# EAGLE board usbc-plug-test (EAGLE 9.4.2)
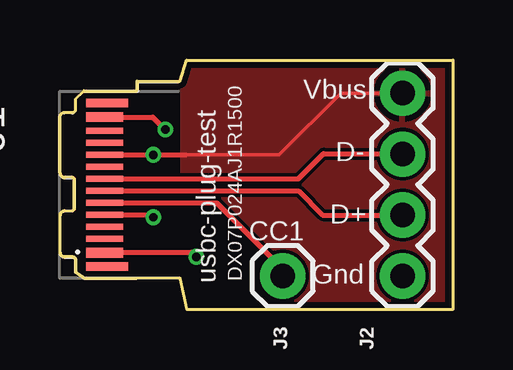
[diagram p0: board, top side]
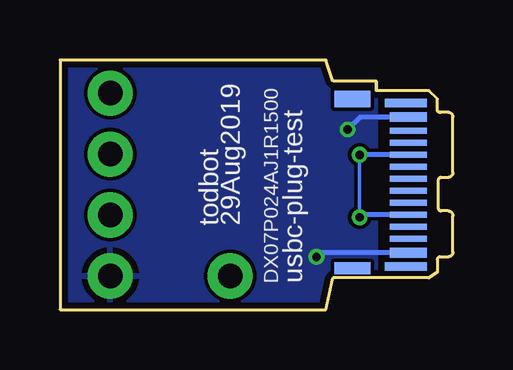
[diagram p1: board, bottom side, seen from below]

Size 16.39 x 10.4 mm. Coordinates in mm from the lower left corner, seen from the top.
Outline: 3.2,9.52 5,9.52 5.29,10.4 16.39,10.4 16.39,0 5.3,0 5,1.32 1,1.32 0.65,1.56 0.65,2.07 arc90 0.55,2.2 0.2,2.2 arc-90 0,2.4 0,3.91 arc-90 0.2,4.11 0.5,4.11 arc90 0.6,4.21 0.6,5.41 arc90 0.5,5.51 0.2,5.51 arc-90 0,5.71 0,8.02 arc-90 0.2,8.22 0.5,8.22 arc90 0.65,8.3 0.65,8.78 1,9.12 3.2,9.12 3.2,9.52
Copper layers (1*16): Top 0.035mm / dielectric 0.785mm / Bottom 0.035mm
Design rules "SeeedStudio_2layer_DRU_no_angle_20140221_blink1thin": minimum track width 6mil, minimum drill 12mil, track to track 6mil, track to pad 6mil, pad to pad 6mil, via to via 6mil, smd to smd 0mil, copper to edge 10mil, drill to drill 10mil, minimum pad ring 10mil, minimum via ring 6mil, stop-mask expansion 2mil, vias tented up to drill 100mil, thermal gap 10mil

## Footprints (pad centres in the part's own frame; a part is rotated, then mirrored left to right if it is on the bottom)
JAE_DX07P024AJ1R1500 = smd 0.36 x 1.75: 13 -3.405,1.975; 14 3.405,1.975 | smd 0.36 x 1.75 bottom: 15 -3.405,1.975; 16 3.405,1.975 | smd 0.7 x 1.5 bottom: 17 -3.575,4.2 | smd 0.5 x 1.5 bottom: 18 3.475,4.2 | smd 0.41 x 1.55: A1 2.825,1.875; A12 -2.825,1.875 | smd 0.26 x 1.55: A2 2.25,1.875; A3 1.75,1.875; A4 1.25,1.875; A5 0.75,1.875; A6 0.25,1.875; A7 -0.25,1.875; A8 -0.75,1.875; A9 -1.25,1.875; A10 -1.75,1.875; A11 -2.25,1.875 | smd 0.41 x 1.55 bottom: B1 -2.825,1.875; B12 2.825,1.875 | smd 0.26 x 1.55 bottom: B2 -2.25,1.875; B3 -1.75,1.875; B4 -1.25,1.875; B5 -0.75,1.875; B6 -0.25,1.875; B7 0.25,1.875; B8 0.75,1.875; B9 1.25,1.875; B10 1.75,1.875; B11 2.25,1.875
1X04 = drill 1.016 pad 1.88: 1 0,0; 2 2.54,0; 3 5.08,0; 4 7.62,0
1X01 = drill 1.016 pad 1.88: 1 0,0

## Placement (x,y rotation side)
J1  DX07P024AJ1R1500  [JAE_DX07P024AJ1R1500]  -0.01,5.2 270 top
J2  [1X04]  14.29,1.4 90 top
J3  [1X01]  9.29,1.4 90 top

## Library data of the parts
J1 = DX07P024AJ1R1500; DESCRIPTION: Cut Tape - Usb Type c Slim Plug; DIGI-KEY_PART_NUMBER: 670-2868-1-ND; DIGI-KEY_PURCHASE_URL: https://www.digikey.com/product-detail/en/jae-electronics/DX07P024AJ1R1500/670-2868-1-ND/6003057?utm_source=snapeda&utm_medium=aggregator&utm_campaign=symbol; MF: JAE Electronics; MP: DX07P024AJ1R1500; PACKAGE: None
J2 = SparkFun-Connectors; PROD_ID: CONN-09696
J3 = SparkFun-Connectors

## Nets
+5V: J1.A4 J1.A9 J1.B4 J1.B9 J2.4
CC: J1.A5 J3.1
GND: J1.A1 J1.A12 J1.B1 J1.B12 J2.1
USB_D+: J1.A6 J2.2
USB_D-: J1.A7 J2.3
VCONN: J1.B5

## Tracks (layer width: path | path; a pad name or v marks a point on that pad's centre or on a via)
+5V  (via drill 0.35)
  Top 0.152: 5.24,6.45 9.14,6.45 11.71,9.02 J2.4
  Top 0.2: J1.B4 v3.89,6.45 5.24,6.45 | J1.B9 3.79,3.95 v3.89,3.85
  Bottom 0.152: v3.89,6.45 v3.89,3.85
  Bottom 0.2: J1.B4 v3.89,6.45 | J1.B9 3.79,3.95 v3.89,3.85
  pour Top: 5.09,11.7 15.99,11.7 15.99,-1 5.09,-1
CC
  Top 0.2: J1.A5 6.54,4.45 9.29,1.7 J3.1
GND  (via drill 0.35)
  Top 0.152: J1.B12 1.89,2.4
  Top 0.2: J1.B1 3.87,8.03 v4.39,7.5 | v5.69,2.2 5.49,2.4 1.89,2.4
  Bottom 0.152: 5.52,2.38 v5.69,2.2
  Bottom 0.2: J1.B12 5.52,2.38 | J1.B1 3.87,8.03 v4.39,7.5
  pour Bottom: 3.19,11.8 15.99,11.8 15.99,-1.1 3.19,-1.1
USB_D+
  Top 0.2: J1.A6 9.94,4.95 10.95,3.94 J2.2
USB_D-
  Top 0.152: 14.27,6.5 J2.3
  Top 0.2: J1.A7 9.94,5.45 10.99,6.5 14.27,6.5

## Text on the board
tPlace: Vbus | D- | CC1 | D+ | Gnd | usbc-plug-test | DX07P024AJ1R1500
bPlace: 29Aug2019 | todbot | usbc-plug-test | DX07P024AJ1R1500